# Altium PCB PCB_board.PcbDoc (part 2 of 2)
Units mm, origin at the board's own origin, x right, y up, seen from the top; angles counter-clockwise.
Board outline 103.73 x 65.51 mm, 2 copper layers (Top Layer, Bottom Layer); 75 components, 72 nets, 367 pads, 85 vias.
Unrouted connection lines stored in the file: 3.
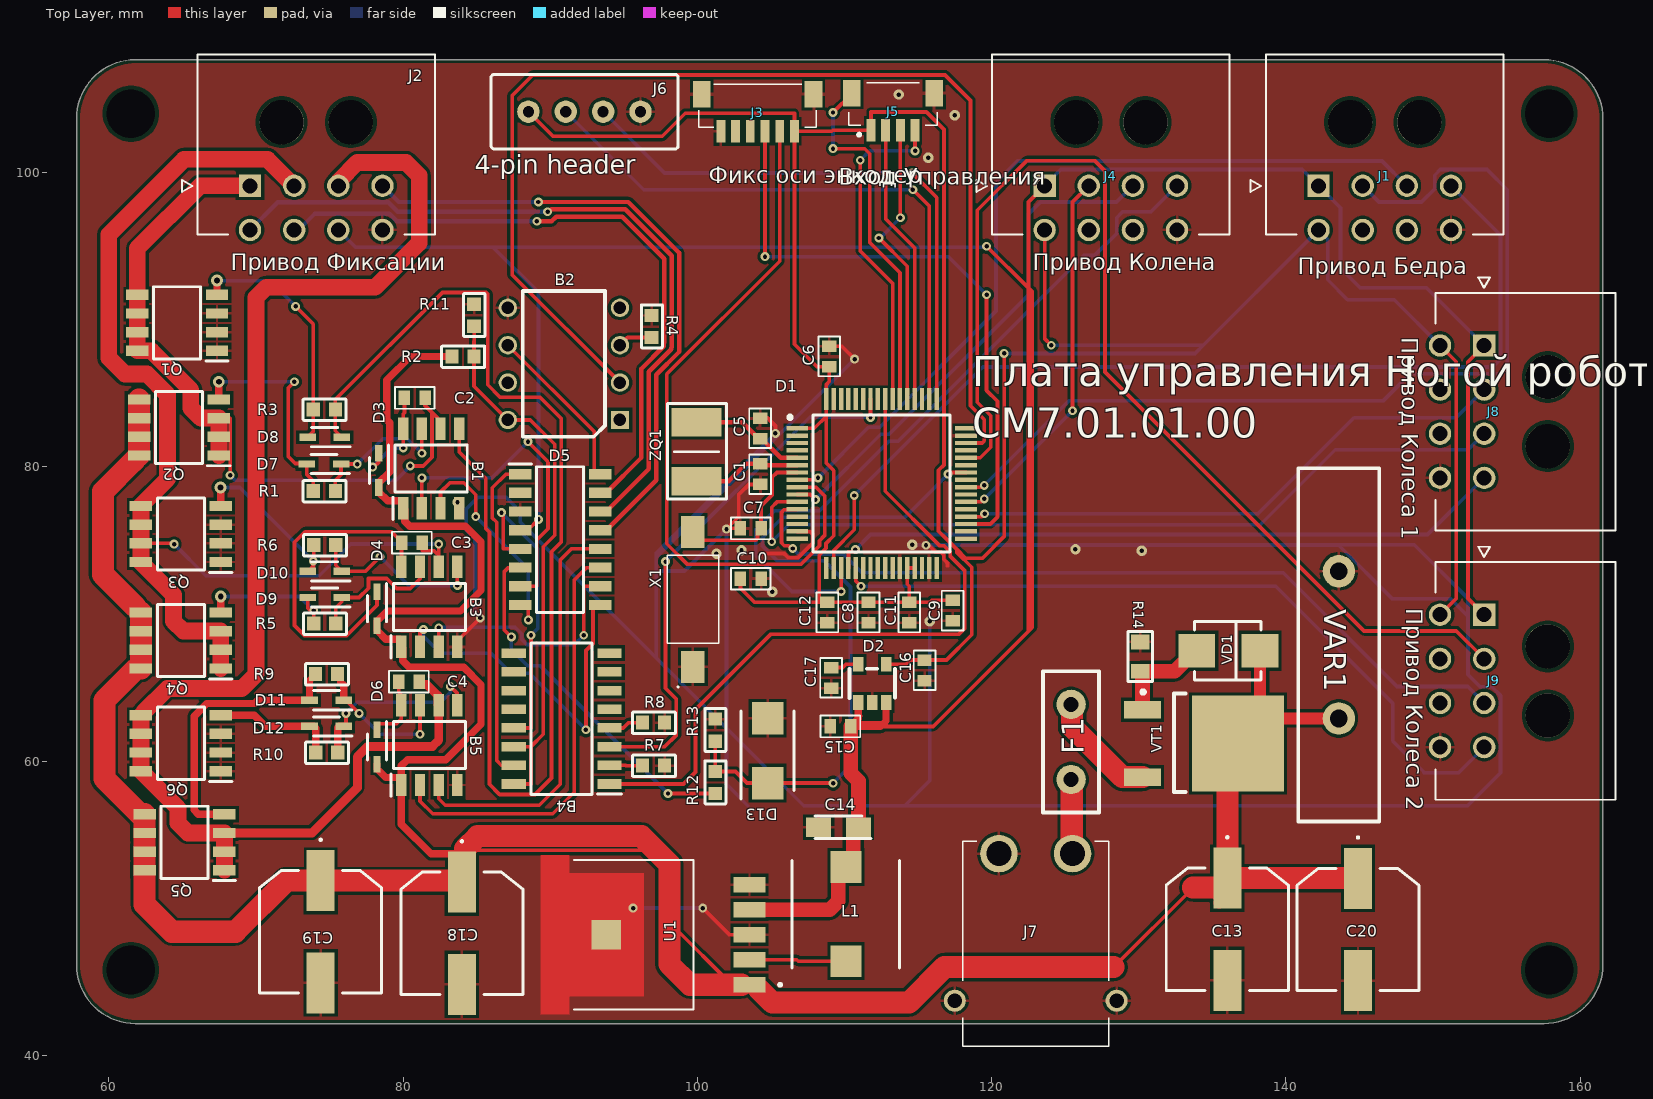
[diagram p0: Top Layer view]

## Via types
v1: diameter 0.6, hole 0.3, Top Layer to Bottom Layer, 66 vias
v2: diameter 0.7, hole 0.3, Top Layer to Bottom Layer, 11 vias
v3: diameter 0.602, hole 0.3, Top Layer to Bottom Layer, 4 vias
v4: diameter 0.8, hole 0.4, Top Layer to Bottom Layer, 4 vias

## Nets (pads, with @x,y where several pads share a name; then routed paths per layer and width w, separated by ;. In a path a pad name is that pad's centre, name@x,y a point inside that pad or via, vN(x,y) a via of type N, cw(c..) or ccw(c..) an arc to the next point about the centre after c; other vN are vias at no path point) (continued)
NetD8_2: (continued)
  Top Layer w0.25: v3(72.7,90.9) 73.901,89.699 R3.2 73.901,82.403 D8.2
  Top Layer w0.508: Q1.4 v4(67.355,92.655)
  Bottom Layer w0.25: v4(67.355,92.655) 70.945,92.655 v3(72.7,90.9)
NetD9_2: D9.2 Q4.4 R5.2 | length 10
  Top Layer w0.25: D9.2 73.514,70.414 v1@73.926,70.002 ; R5.2 v1@73.926,70.002 ; v1(73.926,70.234) v1@73.926,70.002
  Top Layer w0.508: Q4.4 v4(67.609,71.191)
  Bottom Layer w0.25: v4(67.609,71.191) 72.969,71.191 v1(73.926,70.234)
NetD10_2: D10.2 Q3.4 R6.2 | length 12.5
  Top Layer w0.25: D10.2 D10.2@73.66,72.898 ; v1(73.9,73.6) 73.9,73.27 ; R6.2 73.926,73.31 73.9,73.27 ; D10.2@73.66,72.898 73.9,73.27 ; D10.2@73.66,72.898 73.775,72.898 73.9,73.023 73.9,73.27
  Top Layer w0.508: v4(67.6,78.6) 67.6,77.352 Q3.4
  Bottom Layer w0.25: v4(67.6,78.6) 68.9,78.6 v1(73.9,73.6)
NetD11_2: D11.2 Q5.4 R9.2 | length 18.8
  Top Layer w0.5: Q5.4 66.093,56.388 65.8,56.681 65.8,63.059 66.66,63.919 69.92,63.919 70.136,64.135 D11.2 73.641,65.476 74.053,65.888 R9.2
NetD12_2: D12.2 Q6.4 R10.2 | length 8.5
  Top Layer w0.508: Q6.4 69.876,63.119 70.638,62.357 D12.2 73.945,62.357 74.065,62.238 R10.2
NetF1_2: F1.2 VT1.3 | length 7.7
  Top Layer w1.5: F1.2 125.473,63.777 125.473,62.327 128.89,58.91 VT1.3
NetL1_1: L1.1 U1.2 | length 6.6
  Top Layer w0.25: U1.2 106.756,46.5 106.856,46.4 L1.1
NetR14_2: R14.2 VD1.1 VT1.1 | length 7.1
  Top Layer w1: R14.2 R14.2@130.225,66.1 ; VT1.1 130.25,66.075 R14.2@130.225,66.1 ; VD1.1 133.85,67.5 132.45,66.1 R14.2@130.225,66.1
Speed_FB_2: D1.42 D13.1 R12.1 R13.2 | length 47.6
  Top Layer w0.25: R13.2 R12.1 102.591,59.297 103.382,58.506 D13.1 109.22,58.506 v1(109.23,58.496) ; v1(117.043,79.502) 117.158,79.617 D1.42
  Bottom Layer w0.25: v1(109.23,58.496) 110.414,59.68 110.414,71.831 108.618,73.627 105.414,73.627 104.429,74.612 104.429,75.184 105.814,76.568 114.109,76.568 v1(117.043,79.502)
SPI_CLK: D1.55 J5.4 | length 22.5
  Top Layer w0.25: v1(111.074,100.838) 111.074,94.675 113.272,92.477 D1.55 ; v1(114.8,101.473) J5.4
  Bottom Layer w0.25: v1(111.074,100.838) 111.709,101.473 v1(114.8,101.473)
SPI_CS: D1.54 J5.MP1 | length 24.5
  Top Layer w0.25: v1(109.22,101.625) 111.376,101.625 111.719,101.282 111.719,95.25 113.772,93.197 D1.54 ; v1(109.22,104.079) 110.5,105.359 J5.MP1
  Bottom Layer w0.25: v1(109.22,101.625) v1(109.22,104.079)
SPI_MISO: D1.53 J5.2
SPI_MOSI: D1.52 J5.3 | length 19.3
  Top Layer w0.25: 114.272,84.605 114.272,93.627 ; D1.52 114.772,94.874
SW_CLK: D1.50 J6.2 | length 40.5
  Top Layer w0.25: v1(114.656,98.831) 115.772,97.715 D1.50
  Bottom Layer w0.25: J6.2 96.368,98.831 v1(114.656,98.831)
SW_DIO: D1.49 J6.3 | length 38.8
  Top Layer w0.25: v1(114.596,99.974) 116.272,98.298 D1.49
  Bottom Layer w0.25: J6.3 97.765,99.974 v1(114.596,99.974)
pads on no net: B2.1 B2.4 B2.7 B4.5 B4.6 B4.7 B4.8 B4.9 B4.10 B4.11 B4.12 D1.2 D1.3 D1.4 D1.13 D1.14 D1.16 D1.17 D1.22 D1.23 D1.24 D1.25 D1.26 D1.30 D1.32 D1.33 D1.34 D1.37 D1.39 D1.41 D1.43 D1.45 D1.48 D1.51 D1.57 D1.59 D1.60 D1.61 D1.62 D5.2 J1. J1.6 J1.7 J2. J3.5 J4. J4.6 J4.7 J8. J8.6 J8.7 J9. J9.6 J9.7 VT1.
copper on no net: | length 19.5
  Top Layer w0.25: v1(112.344,95.555) 114.272,93.627 ; 112.8,102.875 112.8,96.846 114.772,94.874 ; v1(113.8,96.926) 113.8,102.875
  Bottom Layer w0.25: v1(112.344,95.555) 112.428,95.555 v1(113.8,96.926)

## Polygon pours and split planes (outlines as drawn)
GND on Top Layer "NONET_L02_P-001" (solid, pour order 0): 51.9,112.2 53.3,110.8 174.5,110.8 174.5,38.9 170.2,34.6 166.1,38.7 49.1,38.7
GND on Bottom Layer "NONET_L02_P-001" (solid, pour order 1): 54.9,111.8 171.2,111.8 168.8,109.4 168.8,35.6 59,35.6 54.9,31.5

## Silkscreen, mask and mechanical layers (free items; w line width, h text height)
Top Overlay:
  text "Фикс оси энкодер" at 100.792,98.9 h1.9
  text "Вход Управления" at 109.623,98.8 h1.9
  text "Привод Фиксации" at 68.306,93 h1.9
  text "Привод Колена" at 122.806,93 h1.9
  text "Привод Бедра" at 140.806,92.7 h1.9
  text "Привод Колеса 1" at 147.5,88.794 h1.9 r270
  text "Плата управления Ногой робота / СМ7.01.01.00" at 118.669,81.3 h3.5
  text "Привод Колеса 2" at 147.8,70.4 h1.9 r270
Mechanical 13:
  the board outline again, w0.254